# EAGLE board statkiver1 (EAGLE 9.7.0)

Size 213.37 x 110.09 mm. Coordinates in mm from the lower left corner, seen from the top.
Outline: 0,0 213.37,0 213.37,110.09 0,110.09 0,0
Copper layers (1*16): Top 0.035mm / dielectric 1.5mm / Bottom 0.035mm
Design rules "default": minimum track width 6mil, minimum drill 0.35mm, track to track 6mil, track to pad 6mil, pad to pad 6mil, via to via 6mil, smd to smd 6mil, copper to edge 40mil, drill to drill 6mil, minimum pad ring 10mil, minimum via ring 8mil, stop-mask expansion 4mil, vias tented up to drill 0mil, thermal gap 10mil

## Footprints (pad centres in the part's own frame; a part is rotated, then mirrored left to right if it is on the bottom)
LEDRD254W60D565H860B_G = drill 0.981 pad 1.581: 1 -1.27,0; 2 1.27,0
LEDRD254W60D565H860B = drill 0.981 pad 1.581: 1 -1.27,0; 2 1.27,0
RESAD1016W63L850D250B = drill 0.83 pad 1.43: 1 -5.08,0; 2 5.08,0
SWITCH-MOMENTARY-PTH-6.5MM = drill 1.016 pad 1.88: 1 -3.251,2.261; 2 3.251,2.261; 3 -3.251,-2.261; 4 3.251,-2.261
ARDUINO-UNO-R3-SHIELD = drill 1.016 pad 1.88: 3.3V 24.13,-2.54; 5V 24.13,0; A0 24.13,12.7; A1 24.13,15.24; A2 24.13,17.78; A3 24.13,20.32; A4 24.13,22.86; A5 24.13,25.4; AREF -24.13,-13.97; D2 -24.13,20.32; D3 -24.13,17.78; D4 -24.13,15.24; D5 -24.13,12.7; D6 -24.13,10.16; D7 -24.13,7.62; D8 -24.13,3.81; D9 -24.13,1.27; D10 -24.13,-1.27; D11 -24.13,-3.81; D12 -24.13,-6.35; D13 -24.13,-8.89; GND@0 24.13,2.54; GND@1 24.13,5.08; GND@2 -24.13,-11.43; IOREF 24.13,-7.62; NC 24.13,-10.16; RES 24.13,-5.08; RX -24.13,25.4; SCL -24.13,-19.05; SDA -24.13,-16.51; TX -24.13,22.86; VIN 24.13,7.62
LCD-I2C = drill 1.016 long: 1 -19.05,-5.08; 2 -19.05,-7.62; 3 -19.05,-10.16; 4 -19.05,-12.7

## Placement (x,y rotation side)
D1  GREEN  [LEDRD254W60D565H860B_G]  125.62,39.82 180 top
D2  RED  [LEDRD254W60D565H860B]  147.21,51.25 90 top
R1  250  [RESAD1016W63L850D250B]  119.27,37.28 0 top
R2  1k  [RESAD1016W63L850D250B]  134.51,16.96 0 top
R3  250  [RESAD1016W63L850D250B]  144.67,14.42 0 top
R4  420  [RESAD1016W63L850D250B]  154.83,16.96 180 top
R5  830  [RESAD1016W63L850D250B]  164.99,14.42 0 top
R6  2500  [RESAD1016W63L850D250B]  175.15,16.96 0 top
R7  300  [RESAD1016W63L850D250B]  139.59,52.52 0 top
SDÓŁ  SWITCH_MOMENTARY  [SWITCH-MOMENTARY-PTH-6.5MM]  172.61,28.39 90 top
SGÓRA  SWITCH_MOMENTARY  [SWITCH-MOMENTARY-PTH-6.5MM]  162.45,28.39 90 top
SLEWO  SWITCH_MOMENTARY  [SWITCH-MOMENTARY-PTH-6.5MM]  142.13,28.39 90 top
SPRAWO  SWITCH_MOMENTARY  [SWITCH-MOMENTARY-PTH-6.5MM]  152.29,28.39 90 top
SZATWIERDŹ  SWITCH_MOMENTARY  [SWITCH-MOMENTARY-PTH-6.5MM]  182.77,28.39 90 top
U1  ARDUINO-UNO-R3-SHIELD  [ARDUINO-UNO-R3-SHIELD]  47.88,29.84 270 top
U2  LCD-16X2-I2CSUNFOUNDER-IIC  [LCD-I2C]  157.74,102.55 0 top

## Library data of the parts
D1 = Tinkercad; CATEGORY: Opto-Electronic; SUB-CATEGORY: LED; VALUE: LED_GREEN
D2 = Tinkercad; CATEGORY: Opto-Electronic; SUB-CATEGORY: LED; VALUE: LED_RED
R1-R7 SDÓŁ SGÓRA SLEWO SPRAWO SZATWIERDŹ U1 U2 = Tinkercad

## Nets
D1_C: D1.2 R1.2
SDÓŁ_1: R5.2 R6.1 SDÓŁ.1 SDÓŁ.2
SGÓRA_1: R4.1 R5.1 SGÓRA.1 SGÓRA.2
SPRAWO_1: R3.2 R4.2 SPRAWO.1 SPRAWO.2
SZATWIERDŹ_1: R6.2 SZATWIERDŹ.1 SZATWIERDŹ.2
U1_5V: R2.1 U1.5V U2.2
U1_A0: R2.2 R3.1 SLEWO.1 SLEWO.2 U1.A0
U1_D5: D1.1 U1.D5
U1_D6: D2.1 U1.D6
U1_GND: D2.2 R1.1 R7.2 SDÓŁ.3 SDÓŁ.4 SGÓRA.3 SGÓRA.4 SLEWO.3 SLEWO.4 SPRAWO.3 SPRAWO.4 SZATWIERDŹ.3 SZATWIERDŹ.4 U1.GND@0 U1.GND@1 U1.GND@2 U2.1
U1_SCL: U1.SCL U2.4
U1_SDA: U1.SDA U2.3

## Tracks (layer width: path | path; a pad name or v marks a point on that pad's centre or on a via)
D1_C  (1 unrouted)
SDÓŁ_1  (3 unrouted)
SGÓRA_1  (3 unrouted)
SPRAWO_1  (3 unrouted)
SZATWIERDŹ_1  (2 unrouted)
U1_5V  (2 unrouted)
U1_A0  (4 unrouted)
U1_D5  (1 unrouted)
U1_D6  (1 unrouted)
U1_GND  (16 unrouted)
U1_SCL  (1 unrouted)
U1_SDA  (1 unrouted)